# Altium PCB PCB1.PcbDoc (part 2 of 2)
Units mil, origin at the board's own origin, x right, y up, seen from the top; angles counter-clockwise.
Board outline 3622.05 x 2165.35 mil, 2 copper layers (Top Layer, Bottom Layer); 72 components, 72 nets, 343 pads, 123 vias.
Unrouted connection lines stored in the file: 44.
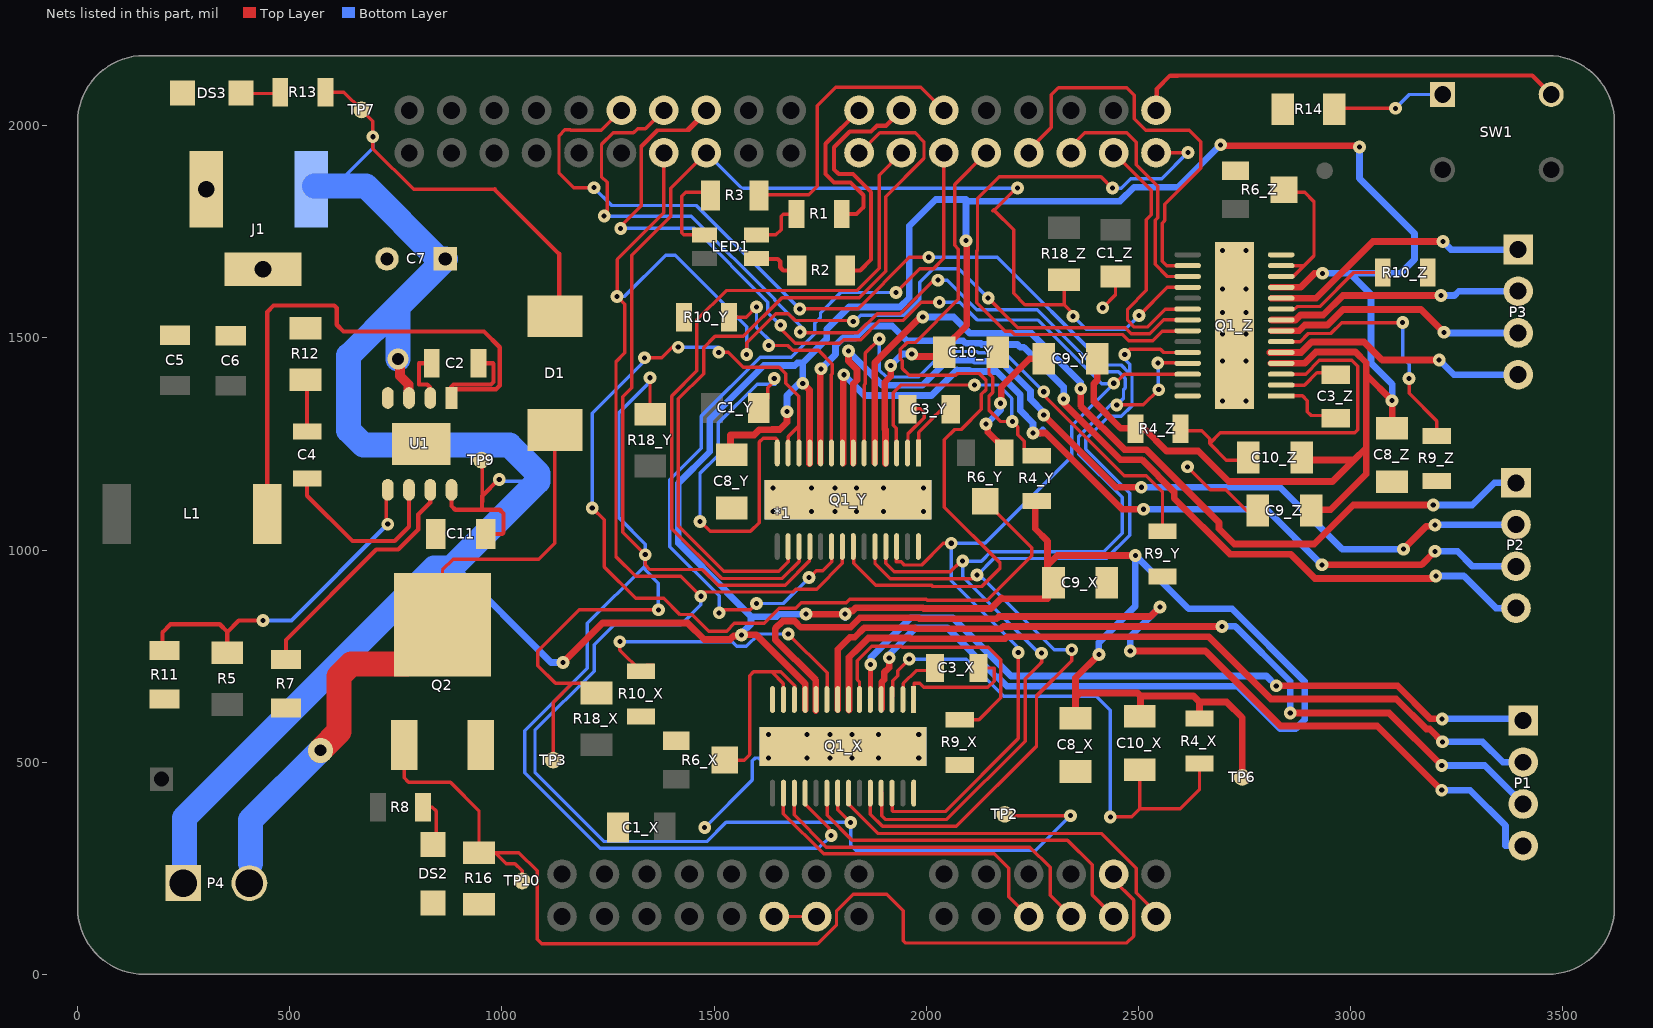
[diagram p2: the nets of this part, all layers, seen from the top]

## Via types
v1: diameter 30, hole 12, Top Layer to Bottom Layer, 120 vias
v2: diameter 50, hole 28, Top Layer to Bottom Layer, 2 vias
v3: diameter 59.06, hole 27.99, Top Layer to Bottom Layer, 1 vias

## Nets (pads, with @x,y where several pads share a name; then routed paths per layer and width w, separated by ;. In a path a pad name is that pad's centre, name@x,y a point inside that pad or via, vN(x,y) a via of type N, cw(c..) or ccw(c..) an arc to the next point about the centre after c; other vN are vias at no path point) (continued)
+12: C7.1 C8_X.1 C8_Y.1 C8_Z.1 C9_X.1 C9_Y.1 C9_Z.1 C10_X.2 C10_Y.2 C10_Z.2 C11.1 D1.2 J1.1 P4.1 Q1_X.4 Q1_X.11 Q1_Y.4 Q1_Y.11 Q1_Z.4 Q1_Z.11 R4_X.1 R4_Y.1 R4_Z.1 R13.1 TP6.1 TP7.1 TP9.1 U1.3 U1.8 | length 16438.7
  Top Layer w8: P4.1@249.09,215 P4.1@249.09,251 ; R13.1@584.15,2079 627.44,2079 TP7.1@669.29,2037.15 696,2010.44 v1(696,1974) 696,1946 792,1850 983,1850 ; TP9.1@952,1212 954,1212 954,1128 ; v1(2694,1955) v1@2696.5,1952.5 ; v1@3018.5,1952.5 v1(3021,1950)
  Top Layer w10: v2(755,1450) v2@760,1445 ; U1.3@780,1359.53 U1.3@781.26,1358.27 ; U1.8@881.26,1141.73 881.26,1103.74 890,1095 953,1095 ; C11.1@962.06,1038 1001,1038 1004,1041 1004,1086 995,1095 953,1095 ; 983,1850 1135,1698 D1.2@1135,1550.86 ; v1(993.75,1166) 992,1166 954,1128 953,1095
  Top Layer w15.75: v1(1144,735) 1237.13,828.13 1437.87,828.13 1476.87,789.13 1538.04,789.13 1546.19,797.27 1562.27,797.27 v1(1565,800) 1599.75,800 1714.63,685.12 Q1_X.11@1714.63,624 ; C8_Y.1@1542,1224.99 1539,1227.99 1539,1271 1594.58,1271 1607.27,1283.69 1637.4,1283.69 1637.58,1283.87 1654.87,1283.87 1672,1301 v1(1672,1326) ; v1(1709.15,1392.88) 1724.92,1377.11 Q1_Y.11@1724.92,1203 ; v1(1717,849) v1(1809,849) 1812.86,849 1819.98,856.13 1826.2,856.13 1834.2,864.12 1991.93,864.12 1993.92,862.13 2152.67,862.13 2177.54,887 2179.54,885 2286.01,885 2286.01,964 ; Q1_X.4@1895,626 1895,688.34 1900.87,694.21 1900.87,711.23 1913,723.36 v1(1913,746) ; Q1_Y.4@1904.06,1204 1904.06,1283.57 1902.29,1285.33 1902.29,1395.42 1916.54,1409.66 v1(1916.54,1434.88) ; v1(1966,1462) 1972,1456 2042.02,1456 2042.02,1475.83 2095.65,1529.46 2095.65,1727.35 v1(2094,1729) ; R4_Y.1@2257,1124.85 2257,1050 2286.01,1020.99 2286.01,964 ; C8_X.1@2352,604 2352,652 ; C9_Y.1@2403,1451 2399,1447 2402.87,1443.13 2402.87,1399.79 2395.13,1392.04 2395.13,1350.21 2458.34,1287 2477.55,1287 R4_Z.1@2481.2,1290.65 ; v1(2407,754) 2352,699 2352,652 ; R4_Z.1@2492.85,1286 2514,1286 2566.46,1233.54 2641.09,1233.54 2712.94,1161.69 2957.69,1161.69 3008,1212 ; v1(2493,987) 2309.01,987 2286.01,964 ; C10_X.2@2503,608 2505,610 2505,656 ; R4_X.1@2644,603 2644,642 ; v1@2696.5,1952.5 v1@3018.5,1952.5 ; TP6.1@2745,464 2745,605 2708,642 2644,642 ; Q1_Z.4@2812,1439.92 Q1_Z.4@2836.68,1439.92 2891.55,1439.92 2918.33,1466.71 3011.67,1466.71 3037,1441.38 3037,1413 ; Q1_Z.11@2813,1619.06 Q1_Z.11@2836.68,1619.06 2882.06,1619.06 2915,1652 v1(2934,1652) ; C10_Z.2@2888,1212 3008,1212 ; C9_Z.1@2906.99,1093 2908.99,1095 2953,1095 3037,1179 3037,1241 ; C8_Z.1@3098,1286.99 v1(3098,1352) 3037,1413 ; 2352,652 2363,663 2498,663 2505,656 ; 2505,656 2630,656 2644,642 ; 3008,1212 3037,1241 ; 3037,1241 3037,1413
  Top Layer w23.62: v2@760,1445 760,1410 780,1390 U1.3@780,1359.53
  Bottom Layer w8: P4.1@249.09,215 254.09,220 P4.1@251.14,222.95 ; J1.1@551.18,1850.39 J1.1@558.29,1857.5 ; 606.5,1857.5 696,1947 v1(696,1974) ; C7.1@851,1686 C7.1@867,1686 ; v1(993.75,1166) 997.75,1162 1085,1162 ; v1(1916.54,1434.88) v1@1920.66,1439
  Bottom Layer w15.75: 887,964 1116,735 v1(1144,735) ; v1(1565,800) 1565,803.86 1587.21,826.07 1587.21,843.13 ; v1(1672,1326) 1672,1364 v1@1705.02,1397.02 ; v1(1709.15,1392.88) 1709.15,1441.15 ; v1(1717,849) 1653.11,849 1647.24,843.13 1587.21,843.13 ; v1@1809,841 v1(1809,849) ; v1(1913,746) 1913,754 1976,817 2049,817 2165,701 2168.23,701 2189.98,679.25 2733.75,679.25 2833.75,579.25 2871.25,579.25 2892,600 2892,690.25 2720.7,861.55 2618.45,861.55 v1(2493,987) 2493,868 2407,782 v1(2407,754) ; v1@1920.66,1439 1943.66,1462 v1(1966,1462) ; v1(2094,1729) 2094,1823 2091,1826 2022.41,1826 1960.18,1763.78 1960.18,1594.52 1938.54,1572.87 1818.24,1572.87 1765.32,1519.96 1765.32,1497.32 1709.15,1441.15 ; 2094,1826 2097.87,1822.13 2457.01,1822.13 2490.21,1855.32 2594.32,1855.32 v1(2694,1955) ; v1(2934,1652) 2999,1652 ; v1(3021,1950) 3021,1876 3151,1746 3151,1685 3118,1652 2999,1652 ; v1(3098,1352) 3098,1391 3048.5,1440.5 3048.5,1602.5 2999,1652 ; 1587.21,843.13 1531.87,898.46 1531.87,900.42 1415.97,1016.32 1415.97,1157.68 1489.87,1231.58 1489.87,1307.58 1617.16,1434.87 1690.16,1434.87 1696.44,1441.15 1709.15,1441.15
  Bottom Layer w59.06: P4.1@251.59,239.95 251.59,368.59 840,957 880,957 887,964 1085,1162 1085,1180 1018,1247 673.59,1247 639,1281.59 639,1458 755,1574 ; J1.1@558.29,1857.5 606.5,1857.5 679.5,1857.5 C7.1@851,1686 ; v2(755,1450) 755,1574 ; C7.1@867,1686 755,1574
Dir_1: *1.J24_10 Q1_X.20 | length 870.7
  Top Layer w8: Q1_X.20@1766.61,429.76 1766.61,374.57 1825.18,316 2333,316 2391,258 2391,186.95 *1.J24_10@2441.73,136.22
Dir_2: *1.J1_3 Q1_Z.20 | length 621.3
  Top Layer w8: *1.J1_3@2441.73,1936.22 2530,1847.95 2530,1789.82 2519,1778.82 2519,1611.82 2474.5,1567.32 2474.5,1541.32 2490.32,1525.5 2520.69,1525.5 2563.06,1567.87 Q1_Z.20@2616.2,1567.87 Q1_Z.20@2617.2,1567.87
Dir_3: *1.J1_11 Q1_Y.20 | length 1876
  Top Layer w8: v1(1512,852) 1519,859 1585,859 v1(1600,874) ; v1(1724,935) 1740.58,951.58 1756.58,951.58 1777.31,972.31 Q1_Y.20@1777.31,995.88 ; v1(1929,1607) 1985,1663 2017.18,1663 2041.73,1687.55 *1.J1_11@2041.73,1936.22
  Bottom Layer w8: v1(1512,852) 1512,892.18 1396.09,1008.09 1396.09,1165.91 1470,1239.82 1470,1315.82 1608.93,1454.75 1681.93,1454.75 1737,1509.82 1737,1535 1751,1549 1751,1558.81 1799.19,1607 v1(1929,1607) ; v1(1600,874) 1663,874 v1(1724,935)
Enable_SMD: *1.J2_7 Q1_X.21 Q1_Y.21 Q1_Z.21 TP2.1 | length 5729.3
  Top Layer w8: *1.J2_7@1381.73,1936.22 1381.73,1795 1271.5,1684.76 v1(1271.5,1597.5) 1290,1579 1290,1465 1269,1444 1269,984.37 1315.37,938 1422,938 1461.81,898.19 1466.19,898.19 1469,901 1685.56,901 1692.56,908 1741.93,908 1802.54,968.61 Q1_Y.21@1802.54,996.24 ; v1(1577,1461) 1577,1488.18 1645.82,1557 1674.82,1557 1690.82,1541 1826.02,1541 v1(1828.02,1539) ; Q1_X.21@1791.6,429.16 1791.6,387.54 1821.14,358 v1(1822,358) 1821.79,357.79 v1@1821.79,357.36 ; v1(2146,1594) 2216,1524 2469.19,1524 2483.69,1509.5 2527.31,1509.5 2560.1,1542.28 Q1_Z.21@2616.2,1542.28 ; TP2.1@2185,377 2188,374 v1(2340,374) v1@2338,376
  Bottom Layer w8: v1(1271.5,1597.5) 1288.32,1597.5 1385.82,1695 1408.18,1695 1577,1526.18 v1(1577,1461) ; v1(1469,891) 1469,871 1422.17,824.17 1265.17,824.17 1217.69,776.69 1217.69,714.75 1078,575.06 1078,476 1241,313 1483.18,313 1528.18,358 v1(1822,358) 1822,304 1834,292 2258,292 v1(2340,374) ; v1(1828.02,1539) 1831.46,1539 1845.46,1553 1946.77,1553 1985,1591.23 1985,1631.18 2016.82,1663 2077,1663 v1(2146,1594)
Fault: *1.J2_5 Q1_X.18 Q1_Y.18 Q1_Z.18 R18_X.2 R18_Y.2 R18_Z.2 TP3.1 | length 6171.3
  Top Layer w8: TP3.1@1121,505 1121,640.68 1165.91,685.6 ; R18_X.2@1223,663.02 1200.43,685.6 1165.91,685.6 ; R18_Y.2@1350,1320.02 1359,1329.02 1349,1339.02 v1(1349,1406.02) 1353,1406.02 v1@1359,1400.02 ; v1(1369,859) 1182,859 1084.8,761.8 1084.8,727.2 1126.4,685.6 1165.91,685.6 ; *1.J2_5@1481.73,1936.22 1397.73,1852.22 1397.73,1786.73 1306,1695 1306,1381.98 1285,1360.98 1285,1042 v1(1338,989) 1338,965 1349,954 1472.81,954 1509.81,917 1667.82,917 1725.03,974.22 Q1_Y.18@1725.03,1005.47 ; Q1_X.18@1715.43,429.76 1715.43,400.94 1771.79,344.59 1771.79,331.21 v1(1776,327) ; 2157,1800 2161,1800 2206,1755 2206,1605 2232.8,1578.2 2325,1578.2 ; 2159,1802 2161.5,1802 2212.5,1853 v1(2215,1853) ; 2325,1578 2325,1578.2 ; R18_Z.2@2325,1636.98 2325,1578.2 ; v1(2346.25,1551) 2346.25,1556.95 2325,1578.2 ; v1(2501.5,1552.5) 2568.06,1619.06 Q1_Z.18@2616.2,1619.06 Q1_Z.18@2617.2,1619.06
  Bottom Layer w8: v1@1355,1406 1355,1403 1276,1324 1276,1075.84 1338,1013.84 v1(1338,989) ; v1(1369,859) 1369,922 1338,953 v1(1338,989) ; *1.J2_5@1481.73,1936.22 1493.78,1936.22 1493.78,1924.17 1564.95,1853 v1(2215,1853) ; v1(1776,327) 1746,297 1232,297 1054,475 1054,573.69 1201.69,721.37 1201.69,827.31 1336.37,962 1336.37,987.37 v1(1338,989) ; v1(2346.25,1551) 2377.25,1520 2469,1520 v1(2501.5,1552.5)
GND: *1.J25_12 *1.J25_14 C1_X.2 C1_Y.2 C1_Z.2 C5.2 C6.2 C7.2 C8_X.2 C8_Y.2 C8_Z.2 C9_X.2 C9_Y.2 C9_Z.2 C11.2 DS2.2 DS3.2 J1.2 Q1_X.14 Q1_X.28 Q1_X.PPAD Q1_Y.14 Q1_Y.28 Q1_Y.PPAD Q1_Z.14 Q1_Z.28 Q1_Z.PPAD Q2.3 R6_X.3 R6_Y.3 R6_Z.3 R7.2 R9_X.2 R9_Y.2 R9_Z.2 R10_X.2 R10_Y.2 R10_Z.2 R11.1 R12.1 R14.1 R16.1 U1.4 U1.PAD | length 2450.7
  Top Layer w8: v1(1467,1067) 1468,1067 1491,1044 1586,1044 1606.25,1064.25 1606.25,1254.57 1615.51,1263.82 1645.18,1263.82 1649,1260 Q1_Y.14@1649,1226.07 ; C1_Y.2@1605.24,1335 1626.83,1356.59 1626.83,1382.87 1642,1398.05 v1(1642,1404) ; Q1_X.PPAD@1628.15,509.88 Q1_X.PPAD@1718.7,509.88 Q1_X.PPAD@1773.82,509.88 1776.77,509.88 Q1_X.PPAD@1804.33,537.44 ; *1.J25_12@1641.73,136.22 *1.J25_14@1741.73,136.22 ; Q1_Y.PPAD@1670.84,1086.09 Q1_Y.PPAD@1821.74,1086.09 ; Q1_X.PPAD@1807.82,530.88 1921.79,530.88 1962.79,571.88 Q1_X.PPAD@1982.48,571.88 ; v1(2416,1571) 2446.12,1601.12 C1_Z.2@2446.12,1644.76 ; v1(2616,1196) 2616,1195 2669.19,1141.81 2706.19,1141.81 2755,1093 C9_Z.2@2781.01,1093
  Top Layer w15.75: v1(2141,1297) 2145.21,1292.79 2145.21,1278 2184.28,1238.93 R6_Y.3@2184.28,1229.09 ; v1(2175,1346) 2176.87,1347.87 2176.87,1383.93 2243.95,1451 C9_Y.2@2277.02,1451
  Bottom Layer w8: v1(1467,1067) 1467,1180.6 1509.75,1223.35 1509.75,1299.35 1601.4,1391 v1@1644,1391 ; v1(1478,346) 1590,458 1590,503 1596.88,509.88 Q1_X.PPAD@1628.15,509.88 1624.9,506.63 Q1_X.PPAD@1607.63,506.63 ; *1.J25_12@1641.73,136.22 1641.73,132.27 *1.J25_12@1645.69,132.27
  Bottom Layer w15.75: v1@2141.5,1296.5 2175,1330 v1(2175,1346)
LED_Blue: *1.J1_12 R3.2 | length 674.6
  Top Layer w8: R3.2@1606.17,1837.46 1723.46,1837.46 1743.19,1857.19 1743.19,2047.19 1787,2091 1986.95,2091 *1.J1_12@2041.73,2036.22
LED_Green: *1.J1_16 R1.2 | length 378
  Top Layer w10: R1.2@1801,1792 1836,1792 1852,1808 1852,1836 1821.78,1866.22 1783,1866.22 1763,1886.22 1763,1957.49 *1.J1_16@1841.73,2036.22
LED_Red: *1.J1_14 R2.2 | length 586.6
  Top Layer w10: R2.2@1809.09,1659 1844.45,1659 1870,1684.55 1870,1843.46 1827.24,1886.22 1793.78,1886.22 1783,1897 1783,1949.2 1820.02,1986.22 1870.22,1986.22 1884,2000 1905.51,2000 *1.J1_14@1941.73,2036.22
Mode0: *1.J2_10 Q1_X.24 Q1_Y.24 Q1_Z.24 | length 4386
  Top Layer w8: v1(1217,1854) 1169,1854 1134.73,1888.27 1134.73,1976.73 1148,1990 1161.48,1990 1162.26,1989.22 1234.73,1989.22 *1.J2_10@1281.73,2036.22 ; v1(1702,1568) 1703,1569 1839.38,1569 1960.38,1690 v1(2006,1690) ; Q1_X.24@1868.25,429.03 1868.25,377.75 1897,349 2071,349 2260,538 2260,656 2343,739 v1(2343,765) ; Q1_Y.24@1879.31,1008.2 1879.31,968.61 1915.2,932.71 2109.76,932.71 2118.05,941 v1(2120,941) ; v1(2468,1461) 2480,1473 2552.18,1473 2559.67,1465.51 Q1_Z.24@2616.2,1465.51 Q1_Z.24@2617.2,1465.51
  Bottom Layer w8: v1(1217,1854) 1259,1812 1458,1812 v1(1702,1568) ; v1(2006,1690) 2167.44,1690 2421.44,1436 2459.81,1436 2477.81,1418 2480,1418 ; v1(2343,765) 2302.18,765 2126.18,941 v1(2120,941) 2159,980 2424.82,980 2480,1035.18 2480,1134 2376,1238 2376,1260.93 2430.07,1315 2460.18,1315 2485,1339.82 2485,1413 2480,1418 ; v1(2468,1461) 2468,1450 2480,1438 2480,1418
Mode1: *1.J2_8 Q1_X.25 Q1_Y.25 Q1_Z.25 | length 4208
  Top Layer w8: v1@1252,1790 1248.26,1793.74 1248.26,1866.56 1234.73,1880.08 1234.73,1955.69 1262.26,1983.22 1310.22,1983.22 1320,1993 1338.51,1993 *1.J2_8@1381.73,2036.22 ; v1(1703,1514) 1704.09,1514 1709.05,1518.95 1716,1512 1839.21,1512 1884.21,1557 1939.18,1557 2018.18,1636 v1(2028,1636) ; Q1_X.25@1894.57,429.76 1895.1,429.23 1895.1,373.52 1903.63,365 2048.82,365 2233,549.18 2233,696.21 2272,735.21 2272,736.42 ; Q1_Y.25@1904.9,996.24 1904.9,968.61 1924.79,948.71 2056.71,948.71 2082,974 v1(2086,974) ; 2269.58,734 2272,736.42 ; v1(2272,757) 2272,736.42 ; v1(2449,1342) 2512,1342 v1(2548,1378) ; v1(2546,1441) 2616.13,1441 Q1_Z.25@2617.2,1439.92
  Bottom Layer w8: v1(1241,1787) 1446.81,1787 1643,1590.81 1643,1588.82 1712.86,1518.95 1707.91,1514 v1(1703,1514) ; v1(2028,1636) 2049.56,1636 2119.56,1566 2262.2,1566 2408.2,1420 2453.18,1420 2469,1404.18 2469,1381.82 2465,1377.82 2465,1358 v1(2449,1342) 2434.44,1342 2359,1266.56 2359,1227.07 2462,1124.07 2462,1110.81 2462,1039.81 2418.19,996 2152.37,996 2130.37,974 v1(2086,974) 2086,936.82 2265.82,757 v1(2272,757) ; v1(2546,1441) 2547,1440 2547,1379 v1(2548,1378)
Mode2: *1.J2_6 Q1_X.26 Q1_Y.26 Q1_Z.26 | length 3848.6
  Top Layer w8: v1(1280,1758) 1280,1763 1328.73,1811.73 1328.73,1949.69 ; v1(1657,1530) 1657,1521.82 1691.82,1487 1796.82,1487 1805.82,1496 1845.84,1496 1890.84,1541 1945.81,1541 1988.81,1584 v1(2031,1584) ; Q1_X.26@1920.16,429.76 1920.16,385.84 1922.29,383.71 2044.9,383.71 2217,555.81 v1(2217,758.5) ; Q1_Y.26@1930.49,1008.2 1929.76,1007.48 1929.76,971.99 1941.38,971.99 1948.66,964.71 1989.09,964.71 2040.38,1016 v1(2059,1016) ; v1(2442,1393) 2446,1393 2467,1414 2557.18,1414 2557.51,1414.33 Q1_Z.26@2616.2,1414.33 ; 1328.73,1949.69 1328.73,1952.95 1365,1989.22 1368.26,1989.22 ; 1328.73,1949.69 1368.26,1989.22 ; 1368.26,1989.22 1434.73,1989.22 ; 1434.73,1989.22 1441.78,1989.22 1481.73,2029.17 *1.J2_6@1481.73,2036.22 1434.73,1989.22
  Bottom Layer w8: v1(1280,1758) 1453.18,1758 1627,1584.18 1627,1559.18 v1@1657,1529.18 ; v1(1657,1530) v1@1657,1529.18 ; v1@1664,1522.18 v1@1657,1529.18 ; v1(2031,1584) 2078.93,1584 2120.93,1542 2263.58,1542 2413.95,1391.63 v1@2442,1391.63 ; v1(2217,758.5) 2217,770 2059,928 v1(2059,1016) 2138.56,1016 2343,1220.44 2343,1292.63 2355.69,1305.31 v1@2442,1391.63 ; v1(2442,1393) v1@2442,1391.63 ; v1@2442.69,1392.31 v1@2442,1391.63
NetC2_1: C2.1 U1.2 | length 133.7
  Top Layer w10: U1.2@831.26,1358.27 830,1359.53 830,1384.14 824.14,1390 805,1390 805,1440 C2.1@834.88,1440
NetC2_2: C2.2 L1.1 U1.1 | length 1525.8
  Top Layer w10: L1.1@447.17,1085 447.17,1561.17 462,1576 605.14,1576 611,1570.14 611,1531 627,1515 958,1515 995,1478 995,1387.86 986,1378.86 890.04,1378.86 881.26,1370.08 U1.1@881.26,1358.74 ; U1.1@881.26,1358.27 U1.1@881.26,1358.74 ; C2.2@945.12,1440 978.82,1440 980,1438.82 980,1395.86 974.14,1390 885.86,1390 880,1384.14 880,1370.08 880,1360 U1.1@881.26,1358.74
NetC3_X_1: C3_X.1 Q1_X.2 | length 112
  Top Layer w8: Q1_X.2@1945.75,650.24 1945.75,685.56 1976.18,716 2007,716 C3_X.1@2009,718
NetC3_X_2: C3_X.2 Q1_X.1 | length 302.6
  Top Layer w8: Q1_X.1@1971.34,650.24 1971.34,686.34 1984.39,686.34 1994.19,676.54 2145.54,676.54 2160,691 2160,722 C3_X.2@2123.18,722
NetC3_Y_1: C3_Y.1 Q1_Y.2 | length 152.9
  Top Layer w8: Q1_Y.2@1957.09,1227.68 1957.09,1274.09 1995,1312 1995,1324 1986,1333 C3_Y.1@1957.82,1333
NetC3_Y_2: C3_Y.2 Q1_Y.1 | length 158.5
  Top Layer w8: Q1_Y.1@1982.68,1227.68 1982.68,1277.05 2011,1305.37 2011,1306.44 2036.56,1332 2049.18,1332 2057,1339.82 C3_Y.2@2057,1348
NetC3_Z_1: C3_Z.1 Q1_Z.2 | length 141.8
  Top Layer w8: Q1_Z.2@2836.68,1388.74 2837.41,1388.01 2891.58,1388.01 2920.93,1417.36 C3_Z.1@2966,1417.36
NetC3_Z_2: C3_Z.2 Q1_Z.1 | length 164.5
  Top Layer w8: Q1_Z.1@2836.68,1363.15 2886.85,1363.15 2898,1352 2898,1326 2907,1317 2964,1317 C3_Z.2@2966,1315
NetC4_1: C4.1 R12.2 | length 123.5
  Top Layer w10: R12.2@537,1400.98 541,1396.98 C4.1@541,1279.12
NetC4_2: C4.2 U1.6 | length 433.5
  Top Layer w10: C4.2@546,1163.88 C4.2@541,1168.88 541,1163.88 541,1128 648,1021 747.57,1021 781.26,1054.69 U1.6@781.26,1141.73
NetC10_X_1: C10_X.1 Q1_X.3 R4_X.2 | length 1271.9
  Top Layer w8: Q1_X.3@1920,653 1920.75,653.75 1920.75,691.75 1932.87,703.87 1932.87,715.87 v1(1960,743) ; v1(2434,371) 2484,371 2503,390 ; C10_X.1@2503,482.02 2503,390 ; R4_X.2@2644,496.7 2644,435 2599,390 2503,390
  Bottom Layer w8: v1(1960,743) 2094.89,743 2182.89,655 2401,655 2434,622 v1(2434,371)
NetC10_Y_1: C10_Y.1 Q1_Y.3 R4_Y.2 | length 834.1
  Top Layer w8: Q1_Y.3@1929.65,1217.56 1929.65,1286.54 1929.19,1286.54 1922.17,1293.56 1922.17,1370.44 1940.73,1389 v1(2114,1389) ; C10_Y.1@2168,1456 2148,1436 2148,1415.81 2157,1406.81 2157,1371.19 2148,1362.19 2148,1329.82 2174.82,1303 v1(2203,1303) ; v1@2204,1303 v1(2203,1303) ; R4_Y.2@2261,1222.15 2246.24,1222.15 2231.54,1236.85 2231.54,1256.46 2216,1272 2216,1290 v1(2203,1303)
  Bottom Layer w8: v1(2114,1389) 2170.18,1389 2202,1357.18 2202,1304 v1(2203,1303)
NetC10_Z_1: C10_Z.1 Q1_Z.3 R4_Z.2 | length 900.3
  Top Layer w8: R4_Z.2@2598.15,1263 2616.15,1281 2649,1281 2668,1262 2668,1251 ; C10_Z.1@2744.01,1212 2707,1212 2668,1251 ; Q1_Z.3@2836.68,1414.33 2894.06,1414.33 2926.56,1446.83 3003.44,1446.83 3017,1433.27 3017,1283 3010.31,1276.31 2693.31,1276.31 2668,1251
NetD1_1: D1.1 P4.2 Q2.4 | length 1513.8
  Top Layer w8: Q2.4@860,823.58 860,953 885,978 1087,978 1125,1016 D1.1@1125,1283.14
  Top Layer w59.06: v3(572.29,528) 616.43,572.14 616.43,702.43 645.06,731.06 775.35,731.06 860,815.71 Q2.4@860,823.58
  Bottom Layer w59.06: 408,261 408,363.71 v3(572.29,528)
NetDS2_1: DS2.1 R8.1 | length 116.6
  Top Layer w8: R8.1@814.15,394 836,394 845,385 845,312.9 DS2.1@838,305.9
NetDS3_1: DS3.1 R13.2 | length 95.2
  Top Layer w8: DS3.1@383.9,2076 474.85,2076 R13.2@477.85,2079
NetLED1_2: LED1.2 R3.1 | length 207.9
  Top Layer w8: LED1.2@1477.98,1742.95 1428.69,1742.95 1424,1747.64 1424,1834 1433,1843 R3.1@1485.91,1843
NetLED1_3: LED1.3 R2.1 | length 114.7
  Top Layer w10: LED1.3@1600.02,1687.15 1601.17,1686 1650.14,1686 1656,1680.14 1656,1666.28 1663.28,1659 R2.1@1694.91,1659
NetLED1_4: LED1.4 R1.1 | length 135.4
  Top Layer w8: LED1.4@1600.02,1742.85 1645.85,1742.85 1658,1755 1658,1787 1662.69,1791.69 1690.39,1791.69 R1.1@1692.7,1794
  Top Layer w10: R1.1@1692.7,1794 R1.1@1694.7,1792
NetP1_1: P1.1 Q1_X.5 | length 1780.7
  Top Layer w8: P1.1@3403.72,595 P1.1@3407,598.28
  Top Layer w11.81: Q1_X.5@1868.31,647.68 1868.31,729.57 v1(1869.04,730.3)
  Top Layer w15.75: v1(2825,680) 3110.63,680 3188.63,602 v1(3216,602)
  Bottom Layer w15.75: v1(1869.04,730.3) 1869.04,745.7 1964.09,840.75 2062.07,840.75 2199.82,703 2802,703 v1(2825,680) ; v1(3216,602) 3403.28,602 P1.1@3407,598.28
NetP1_2: P1.2 Q1_X.7 | length 1857.6
  Top Layer w15.75: Q1_X.7@1818,623 1818,747.17 1841.46,770.63 1863.71,792.87 1961.59,792.87 1963.58,790.88 2186.18,790.88 2191.17,795.87 2665.46,795.87 2812.21,649.13 3107.92,649.13 3178.79,578.25 3186.75,578.25 v1(3217,548)
  Bottom Layer w15.75: v1(3217,548) 3311,548 3359.15,499.85 P1.2@3407,499.85
NetP1_3: P1.3 Q1_X.8 | length 1998.3
  Top Layer w15.75: Q1_X.8@1791.54,624 Q1_X.8@1791.54,647.68 1791.54,765.54 1820.38,794.38 1831.63,794.38 1853.87,816.62 1972.25,816.62 1974.24,814.63 2176.34,814.63 2181.34,819.62 2696.62,819.62 v1(2697,820) ; v1(2858,616) 3091,616 v1(3215,492)
  Bottom Layer w15.75: v1(2697,820) 2728.66,820 2858,690.66 v1(2858,616) ; v1(3215,492) 3316.43,492 P1.3@3407,401.43
NetP1_4: P1.4 Q1_X.10 | length 2459.9
  Top Layer w8: P1.4@3401,297 P1.4@3407,303
  Top Layer w15.75: Q1_X.10@1740,622 1740,693.34 1644.13,789.21 1644.13,814.79 1662.21,832.87 1689.46,832.87 1704.21,818.13 1821.79,818.13 1844.03,840.37 1982.09,840.37 1984.08,838.38 2166.51,838.38 2171.5,843.37 2528.37,843.37 v1(2551,866) ; v1(2481,762) 2658,762 2834.87,585.13 3062.87,585.13 3214,434 v1(3215,434)
  Bottom Layer w15.75: v1(2481,762) 2481,796 v1(2551,866) ; v1(3215,434) 3282,434 3365.45,350.55 3365.45,303 P1.4@3407,303
NetP2_1: P2.1 Q1_Y.5 | length 2113.1
  Top Layer w15.75: Q1_Y.5@1878.62,1206.16 1878.54,1206.24 1878.54,1440.83 1986.71,1549 v1(1992,1549) ; v1(2364,1380) 2364,1339.71 2467.05,1236.66 2518.21,1236.66 2690,1064.87 2690,1050 2726,1014 2914.42,1014 3006.42,1106 v1(3195,1106)
  Bottom Layer w15.75: v1(1992,1549) 2064.75,1549 2102.28,1511.47 2248.58,1510.42 2364,1395 v1(2364,1380) ; v1(3195,1106) 3287,1106 3339.43,1158.43 P2.1@3390,1158.43
NetP2_2: P2.2 Q1_Y.7 | length 2133.5
  Top Layer w8: Q1_Y.7@1828.13,1203.13 Q1_Y.7@1828.13,1205
  Top Layer w15.75: v1(1817,1469) 1817,1445.66 1836.87,1425.79 1836.87,1400.21 1828,1391.34 Q1_Y.7@1828,1205 ; v1(2277,1318) 2447,1148 v1(2507,1148) ; v1(3125,1002) 3179.27,1056.27 3196.27,1056.27 v1(3199,1059)
  Bottom Layer w15.75: v1(1817,1469) 1817,1468.13 1897.12,1388.01 1990.82,1388.01 2050.78,1447.97 2075.97,1447.97 2111.53,1447.72 2114.63,1444.62 2176.25,1444.62 2245.62,1375.25 2245.62,1355.5 2277,1324.13 v1(2277,1318) ; v1(2507,1148) 2834.18,1148 2980.18,1002 v1(3125,1002) ; v1(3199,1059) 3199.5,1059.5 3389.5,1059.5 P2.2@3390,1060
NetP2_3: P2.3 Q1_Y.8 | length 2117.1
  Top Layer w15.75: Q1_Y.8@1804.25,1205 1804.25,1411.25 v1(1806,1413) ; v1(2251.55,1276) 2281.76,1276 2461.76,1096 v1(2512,1096) ; v1(2933,965) 3167,965 v1(3199,997)
  Bottom Layer w15.75: v1(1806,1413) 1854.74,1364.26 2012.6,1364.26 2072.52,1424.18 2101.69,1423.97 2104.79,1420.87 2166.42,1420.87 2221.87,1365.42 2221.87,1328.46 2251.55,1298.79 v1(2251.55,1276) 2268,1276 2275,1283 ; v1(2512,1096) 2802,1096 v1(2933,965) ; v1(3199,997) 3252,997 3287.43,961.57 P2.3@3390,961.57
NetP2_4: P2.4 Q1_Y.10 | length 2224.8
  Top Layer w15.75: Q1_Y.10@1750.68,1206 1750.68,1425.68 v1(1752,1427) ; v1(2324,1356) 2324,1346.13 2457.21,1212.91 2508.38,1212.91 2584.31,1136.98 2584.31,1122.1 2716.16,990.25 2858.75,990.25 2916,933 3195,933 v1(3201,939)
  Bottom Layer w15.75: v1(1752,1427) 1786.13,1461.13 1786.13,1481.79 1804.21,1499.87 1832.56,1499.87 1860.73,1528.04 1920.14,1528.04 1955.31,1492.87 2087.29,1492.87 2092.44,1487.72 2127.99,1487.47 2131.09,1484.37 2215.02,1484.37 2221.39,1478 2230.25,1477.94 2324,1384.18 v1(2324,1356) ; v1(3201,939) 3267.15,939 3343,863.15 P2.4@3390,863.15
NetP3_1: P3.1 Q1_Z.10 | length 644.4
  Top Layer w15.75: Q1_Z.10@2814,1593.46 Q1_Z.10@2836.68,1593.46 2836.91,1593.7 2919.36,1593.7 3052.66,1727 v1(3218,1727)
  Bottom Layer w8: P3.1@3394.57,1708 P3.1@3395,1708.43
  Bottom Layer w15.75: v1(3218,1727) 3237,1708 P3.1@3394.57,1708
NetP3_2: P3.2 Q1_Z.8 | length 611.9
  Top Layer w8: P3.2@3393,1608 P3.2@3395,1610
  Top Layer w15.75: Q1_Z.8@2814,1542.28 Q1_Z.8@2836.68,1542.28 2870.53,1542.28 2882.2,1553.95 2935.83,1553.95 2981.87,1600 v1(3213,1600)
  Bottom Layer w15.75: v1(3213,1600) 3245,1600 3255,1610 P3.2@3395,1610
NetP3_3: P3.3 Q1_Z.7 | length 630.9
  Top Layer w8: P3.3@3390.61,1515.96 P3.3@3395,1511.57
  Top Layer w15.75: Q1_Z.7@2814,1516.69 Q1_Z.7@2836.68,1516.69 2878.52,1516.69 2892.03,1530.2 2945.66,1530.2 2982.33,1566.87 3166.13,1566.87 3220,1513 v1(3220.5,1513)
  Bottom Layer w15.75: v1(3220.5,1513) 3221.93,1511.57 P3.3@3395,1511.57
NetP3_4: P3.4 Q1_Z.5 | length 627.4
  Top Layer w15.75: Q1_Z.5@2810,1465.51 Q1_Z.5@2836.68,1465.51 2883.55,1465.51 2908.5,1490.46 3032.13,1490.46 3074.58,1448 v1(3209,1448)
  Bottom Layer w15.75: v1(3209,1448) 3243.85,1413.15 P3.4@3395,1413.15
NetQ1_X_6: Q1_X.6 R9_X.1 | length 666.6
  Top Layer w8: Q1_X.6@1842.72,647.68 1842.72,690.1 1838,694.82 1838,739.06 1860.3,761.36 1871.94,773 1941,773 1942.99,771.01 2146.26,771.01 2176,741.27 2176,651.54 2124.46,600 R9_X.1@2079,600
NetQ1_X_9: Q1_X.9 R10_X.1 | length 729.2
  Top Layer w8: v1(1278,784) 1278,764.3 R10_X.1@1328,714.3 1342.7,729 R10_X.1@1357.46,729 ; v1(1675,802) 1766.61,710.39 Q1_X.9@1766.61,650.24
  Bottom Layer w8: v1(1278,784) 1542.82,784 1553.82,773 1576.18,773 1605.18,802 v1(1675,802)
NetQ1_X_12: Q1_X.12 Q1_X.13 R6_X.2 | length 507.1
  Top Layer w8: R6_X.2@1525.09,505 1571,505 1584,518 1584,704 1593,713 1636,713 ; Q1_X.13@1664,625.82 Q1_X.13@1663.58,626.24 ; Q1_X.12@1689.84,650.24 1689.84,680.16 1657,713 1636,713 ; 1636,713 1663.58,685.42 Q1_X.13@1663.58,647.68 Q1_X.13@1663.58,629.76 ; Q1_X.13@1663.58,626.24 Q1_X.13@1663.58,629.76 ; Q1_X.13@1663.58,626.24 1661.82,628 Q1_X.13@1663.58,629.76
NetQ1_Y_6: Q1_Y.6 R9_Y.1 | length 1289.8
  Top Layer w8: Q1_Y.6@1853.72,1228.68 1853.72,1388.95 1856.75,1391.98 1856.75,1464.38 v1(1889.54,1497.17) ; v1(2277,1373) 2277,1364.82 2466.82,1175 2518.18,1175 2557,1136.18 R9_Y.1@2557,1044.15
  Bottom Layer w8: v1(1889.54,1497.17) 1889.54,1423.7 1905.35,1407.88 1982.59,1407.88 2042.55,1467.85 2084.21,1467.85 2119.76,1467.59 2122.86,1464.5 2185.5,1464.5 v1(2277,1373)
NetQ1_Y_9: Q1_Y.9 R10_Y.1 | length 567.9
  Top Layer w8: R10_Y.1@1535.15,1549 1576,1549 v1(1600,1573) ; v1(1629,1482) 1674.19,1482 1685.19,1471 1746.18,1471 1779,1438.18 1779,1415.82 1776.13,1412.94 Q1_Y.9@1776.13,1217.58
  Bottom Layer w8: v1(1600,1573) 1600,1525 v1@1639,1486
NetQ1_Y_12: Q1_Y.12 Q1_Y.13 R6_Y.2 | length 2530.7
  Top Layer w8: v1(1213,1099) 1241,1071 1241,960 1315,886 1381.82,886 1419.82,848 1448.19,848 1487.19,809 1529.81,809 1547.81,827 1618.23,827 1653.98,862.75 1692.56,862.75 1705.82,876 1811.85,876 1819.84,883.99 2000.16,883.99 2002.15,882 2144.44,882 2249,986.56 2249,1004.91 R6_Y.2@2139,1114.91 ; v1(1336,1453) 1377,1453 1405.55,1481.55 1412.18,1481.55 v1(1415.73,1478) ; v1(1511.15,1465.88) 1533.93,1465.88 1568.82,1431 1653.18,1431 1669,1415.18 1669,1393.18 1699.33,1362.85 1699.33,1292.33 ; Q1_Y.13@1674.58,1228.68 1674.58,1249.24 1672.82,1251 1674.58,1252.76 1674.58,1267.58 1699.33,1292.33 ; Q1_Y.12@1699.33,1217.56 1699.33,1292.33
  Bottom Layer w8: v1(1213,1099) 1213,1322 1336,1445 v1(1336,1453) ; v1(1415.73,1478) 1511,1478 v1@1513,1476
NetQ1_Z_6: Q1_Z.6 R9_Z.1 | length 583
  Top Layer w8: Q1_Z.6@2858.59,1491.1 2881.04,1491.1 2900.26,1510.33 2953.9,1510.33 2979.57,1536 v1(3123,1536) ; v1(3138,1404) 3138,1369.05 3203,1304.05 R9_Z.1@3203,1269.15
  Bottom Layer w8: v1(3123,1536) 3123,1453 3138,1438 v1(3138,1404)
NetQ1_Z_9: Q1_Z.9 R10_Z.1 | length 273.8
  Top Layer w8: Q1_Z.9@2837.68,1567.87 2838.42,1568.62 2868.75,1568.62 2873.96,1573.83 2927.6,1573.83 3007.77,1654 R10_Z.1@3075.85,1654
NetQ1_Z_12: Q1_Z.12 Q1_Z.13 R6_Z.2 | length 360.8
  Top Layer w8: Q1_Z.13@2836.68,1670.24 2853.24,1670.24 2855,1672 2856.76,1670.24 2888.41,1670.24 2889.32,1669.32 ; Q1_Z.12@2837.68,1644.65 2864.65,1644.65 2889.32,1669.32 ; R6_Z.2@2843.09,1849 2862,1849 2868,1843 2892,1843 2914,1821 2914,1694 2889.32,1669.32
NetR5_1: R5.1 R11.2 U1.5 | length 825.6
  Top Layer w8: v1(731,1061) 727.52,1064.48 727.52,1137.99 U1.5@731.26,1141.73
  Top Layer w10: R11.2@205,763.09 200,768.09 200,806 219,825 335,825 353,807 ; R5.1@353,758.02 353,807 ; v1@432,834 380,834 353,807 ; v1@436,833 v1(437,834)
  Bottom Layer w10: v1(437,834) 504,834 v1(731,1061)
NetR7_1: R7.1 U1.7 | length 572.4
  Top Layer w10: R7.1@499,744 491,752 491,788 704,1001 755.85,1001 803,1048.15 803,1084 831.26,1112.26 U1.7@831.26,1141.73
NetR14_2: R14.2 SW1.1 | length 269.3
  Top Layer w8: R14.2@2962.02,2039 2964.02,2041 v1(3106,2041)
  Bottom Layer w8: v1(3106,2041) 3138.58,2073.58 SW1.1@3217.05,2073.58
PWM_3.3v: *1.J24_9 Q2.1 R16.2 TP10.1 | length 2549.8
  Top Layer w8: Q2.1@769.84,540.12 769.84,463.16 780,453 879,453 946,386 R16.2@946,287.02 983.98,287.02 ; TP10.1@1051,217 TP10.1@1048,220 1048,244 1031,261 1010,261 983.98,287.02 ; *1.J24_9@2441.73,236.22 2441.73,222.27 2488.73,175.27 2488.73,90.27 2472.46,74 1950.69,74 1946,78.69 1946,150 1906.78,189.22 1828.26,189.22 1788.73,149.69 1788.73,116.75 1743.98,72 1094,72 1083.02,82.98 1083.02,243.98 1039.98,287.02 983.98,287.02
Reset_1: *1.J24_6 Q1_X.16 | length 764.3
  Top Layer w8: Q1_X.16@1663.58,425.42 1663.58,378.61 1758.19,284 2160.42,284 2194.73,249.69 2194.73,183.22 *1.J24_6@2241.73,136.22
Reset_2: *1.J1_7 Q1_Z.16 | length 987.8
  Top Layer w8: *1.J1_7@2241.73,1936.22 2241.73,1942.73 2294.73,1995.73 2294.73,2072.73 2311.73,2089.73 2472.27,2089.73 2490,2072 2490,2016 2517,1989 2620,1989 2647,1962 2647,1900.18 2562,1815.18 2562,1776.56 2556,1770.56 2556,1681 2566.76,1670.24 Q1_Z.16@2616.2,1670.24 Q1_Z.16@2617.2,1670.24
Reset_3: *1.J1_15 Q1_Y.16 | length 1818.7
  Top Layer w8: Q1_Y.16@1674.86,1006.48 1674.86,971.86 1653,950 1523.19,950 1416,1057.19 1416,1356.32 1475.55,1415.87 1475.55,1476.73 1502.35,1503.54 1568.72,1503.54 1660.18,1595 1842.76,1595 1905,1657.24 1905,1833 1994.73,1922.73 1994.73,1962.27 1973.78,1983.22 1922.26,1983.22 1922.04,1983 1891.04,1983 1844.26,1936.22 *1.J1_15@1841.73,1936.22
S1: *1.J1_2 SW1.2 | length 1012
  Top Layer w10: *1.J1_2@2541.73,2036.22 2543.22,2037.71 2543.22,2086.22 2575,2118 2592,2118 2592.11,2118.11 3428.43,2118.11 SW1.2@3472.95,2073.58
Sleep_1: *1.J24_8 Q1_X.17 | length 844.2
  Top Layer w8: Q1_X.17@1689.17,429.17 1689.17,375.64 1764.82,300 2244.42,300 2292,252.42 2292,185.95 *1.J24_8@2341.73,136.22
Sleep_2: *1.J1_5 Q1_Z.17 | length 591.6
  Top Layer w8: *1.J1_5@2341.73,1936.22 2341.73,1951.73 2373.22,1983.22 2472.78,1983.22 2494.73,1961.27 2494.73,1908.27 2546,1857 2546,1783.19 2540,1777.19 2540,1673 2568.35,1644.65 Q1_Z.17@2617.2,1644.65
Sleep_3: *1.J1_13 Q1_Y.17 | length 1691.2
  Top Layer w8: Q1_Y.17@1701.18,1007.2 1701.18,972.99 1661.19,933 1517.56,933 1400,1050.56 1400,1362.94 1459.55,1422.49 1459.55,1542.54 1528.58,1611.57 1836.69,1611.57 1889,1663.87 1889,1883.49 *1.J1_13@1941.73,1936.22
Step_1: *1.J24_12 Q1_X.22 | length 901.7
  Top Layer w8: Q1_X.22@1817.8,429.76 1817.8,400.39 1886.18,332 2412.42,332 2494.73,249.69 2494.73,191.9 2541.73,144.9 *1.J24_12@2541.73,136.22
Step_2: *1.J1_1 Q1_Z.22 | length 1430.5
  Top Layer w8: v1(2439,1853) 2412,1880 2172,1880 2121,1829 2121,1706.91 2119,1704.91 2119,1582.82 2186.41,1515.4 2200.55,1515.4 2207.95,1508 2462.56,1508 2477.06,1493.5 2533.94,1493.5 2556.44,1516 2616.51,1516 Q1_Z.22@2617.2,1516.69 ; *1.J1_1@2541.73,1936.22 2542.12,1936.61 2616.61,1936.61 v1(2617,1937)
  Bottom Layer w8: v1(2439,1853) 2459.78,1853 2481.98,1875.2 2555.2,1875.2 v1(2617,1937)
Step_3: *1.J1_9 Q1_Y.22 | length 1797
  Top Layer w8: Q1_Y.22@1828.13,1008.2 1828.85,1007.48 1828.85,969.15 1881.29,916.71 2012.7,916.71 2015.4,914 2131.18,914 2174,956.82 2174,970 2043,1101 2043,1259.8 2067.2,1284 2082.27,1284 2130,1331.73 2130,1366.82 2141,1377.82 2141,1400.18 2125.18,1416 2073.96,1416 2069.96,1412 1959.82,1412 1944,1427.82 1944,1445.82 1939,1450.82 1939,1473.18 1954.82,1489 1974.18,1489 2075.78,1590.59 2075.78,1709.04 2067,1717.82 2067,1861.49 *1.J1_9@2141.73,1936.22
pads on no net: *1.J1_4 *1.J1_6 *1.J1_8 *1.J1_10 *1.J2_1 *1.J2_2 *1.J2_3 *1.J2_4 *1.J2_9 *1.J2_11 *1.J2_12 *1.J2_13 *1.J2_14 *1.J2_15 *1.J2_16 *1.J2_17 *1.J2_18 *1.J2_19 *1.J2_20 *1.J24_1 *1.J24_2 *1.J24_3 *1.J24_4 *1.J24_5 *1.J24_7 *1.J24_11 *1.J25_1 *1.J25_2 *1.J25_3 *1.J25_4 *1.J25_5 *1.J25_6 *1.J25_7 *1.J25_9 *1.J25_10 *1.J25_11 *1.J25_13 *1.J25_15 Q1_X.19 Q1_X.23 Q1_X.27 Q1_Y.19 Q1_Y.23 Q1_Y.27 Q1_Z.19 Q1_Z.23 Q1_Z.27

## Polygon pours and split planes (outlines as drawn)
GND on Bottom Layer "GND_L02_P001" (solid, pour order 1): 157.48,0 cw(c157.48,157.48) 0,157.48 0,2007.87 cw(c157.48,2007.87) 157.48,2165.35 3464.57,2165.35 cw(c3464.57,2007.87) 3622.05,2007.87 3622.05,157.48 cw(c3464.57,157.48) 3464.57,0
GND on Top Layer "GND_L01_P000" (solid, pour order 0): 173.24,34.51 cw(c173.24,191.99) 15.76,191.99 15.76,2042.38 cw(c173.24,2042.38) 173.24,2199.86 3480.32,2199.86 cw(c3480.32,2042.38) 3637.8,2042.38 3637.8,191.99 cw(c3480.32,191.99) 3480.32,34.51

## Keep-outs
Keep-Out Layer:
  the board outline again, w39.37

## Silkscreen, mask and mechanical layers (free items; w line width, h text height)
Top Overlay:
  text "Peng Cheng" at 2733,370 h39.37
  text "Fuzhen Liu" at 2733,285 h39.37
  text "Kim Bender" at 2733,213 h39.37
  text "Levi Smith" at 2733,144 h39.37

## Text inside footprints (layer, text, board x,y; h text height)
C7: Top Overlay "+" at 1018,1738 h60 r180